# Altium PCB ywz0705_3.PcbDoc
Units mil, origin at the board's own origin, x right, y up, seen from the top; angles counter-clockwise.
Board outline 6000 x 4000 mil, 2 copper layers (Top Layer, Bottom Layer); 10 components, 30 nets, 124 pads, 5 vias.
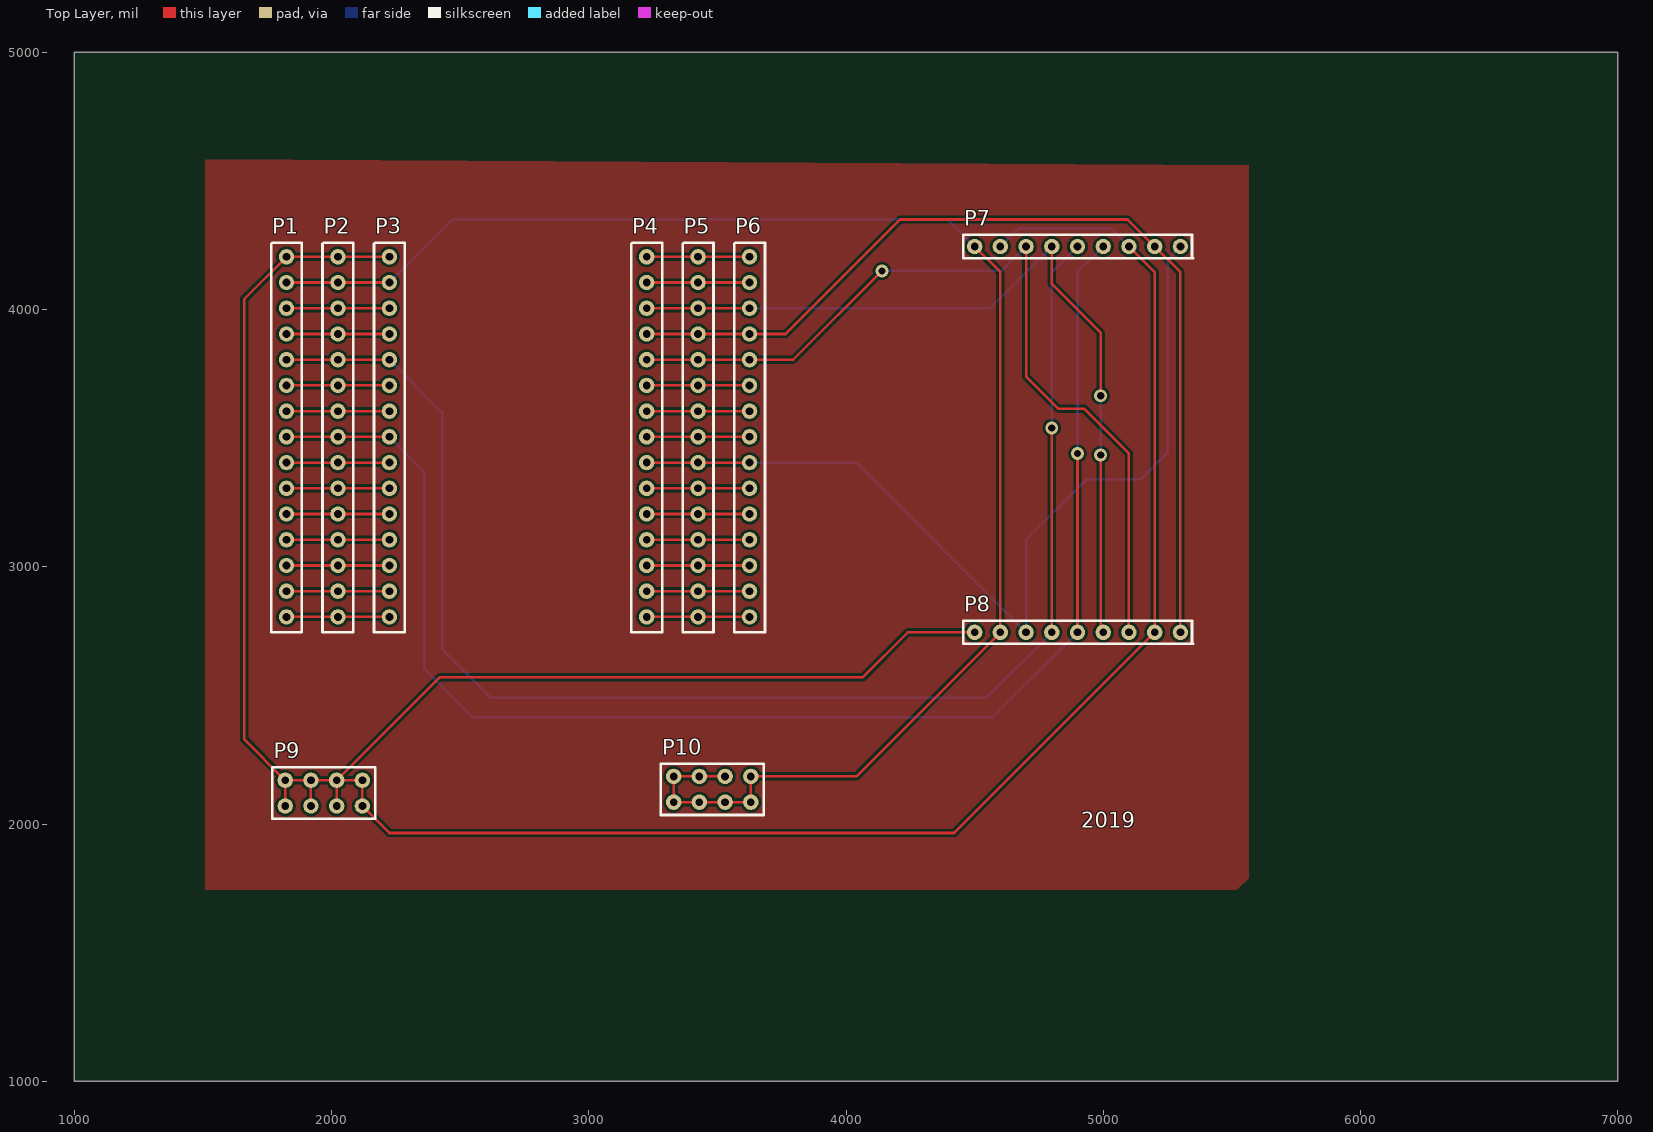
[diagram p0: Top Layer view]
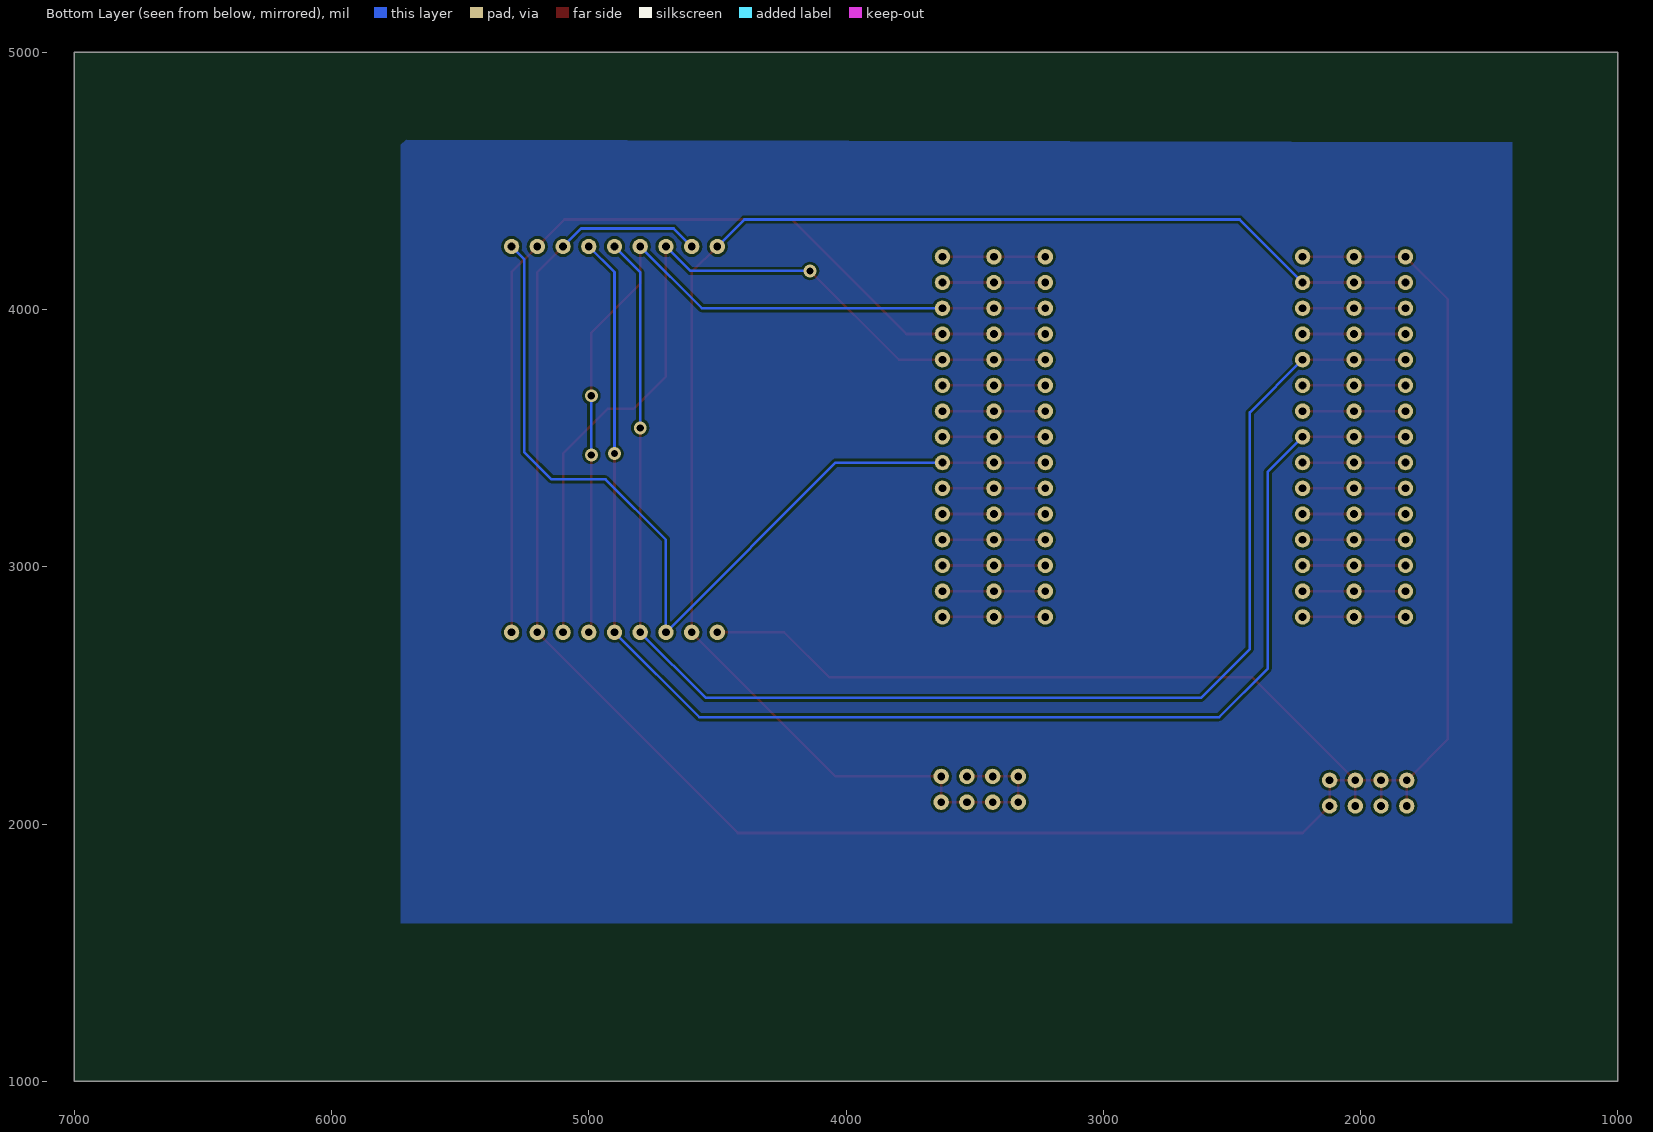
[diagram p1: Bottom Layer view, seen from below]

## Layer stack, top to bottom
Top Solder: solder mask 0.4, Solder Resist, Dk 3.5
Top Layer: signal copper 1.4
Dielectric 1: dielectric 12.6, FR-4, Dk 4.8
Bottom Layer: signal copper 1.4
Bottom Solder: solder mask 0.4, Solder Resist, Dk 3.5

## Board outline
1000,1000 7000,1000 7000,5000 1000,5000

## Design rules (kind name [scope] priority, off if disabled: settings)
Clearance [All] p1: gap=10 ignorepadtopadclearanceinfootprint=FALSE except(0: Arc-Hole Track-Hole SMDPad-Hole THPad-Hole Via-Hole Fill-Hole Poly-Hole Region-Hole Text-Hole)
PolygonConnect [All] p1: connectstyle=Relief reliefconductorwidth=10 reliefentries=4 polygonreliefangle="90 Angle" airgapwidth=10
RoomDefinition ywz0705_2 [InComponentClass('ywz0705_2')] p1: confinementstyle=ConfineIn formatcopy=TRUE lockcomponents=FALSE outline 1570,1865 5415,1865 5415,4430 1570,4430
RoutingVias [All] p1: holewidth=28 width=50 viastyle="Through Hole" minholewidth=28 minwidth=50 maxholewidth=28 maxwidth=50
SolderMaskExpansion [All] p1: expansion=4
Width [All] p1: maxlimit=10 minlimit=10 preferedwidth=10
30 further rules are at their usual default settings.

## Components (designator, comment, footprint, x,y, rotation, side; value= is the part's Value field where it differs from the comment)
P1 "paizhen_15" paizhen_15 1825,2805 r0 top
P2 "paizhen_15" paizhen_15 2025,2805 r0 top
P3 "paizhen_15" paizhen_15 2225,2805 r0 top
P4 "paizhen_15" paizhen_15 3225,2805 r0 top
P5 "paizhen_15" paizhen_15 3425,2805 r0 top
P6 "paizhen_15" paizhen_15 3625,2805 r0 top
P7 "paizhen_9" paizhen_9 4500,4245 r270 top
P8 "paizhen_9" paizhen_9 4500,2745 r270 top
P9 "paizhen_2_4" paizhen_2_4 2120,2070 r90 top
P10 "paizhen_2_4" paizhen_2_4 3630,2085 r90 top

## Footprints (in the part's own frame and the unit in brackets; to place one, negate y for a bottom-side part, rotate by r counter-clockwise, add the part's x,y. Pads: shape width x height; smd on the part's side, far side on the other; paste and mask are expansions set on the pad)
paizhen_2_4 [mil]
  round 60 hole 30: 1(100,0) 2(100,100) 3(100,200) 4(100,300) 5(0,300) 6(0,200) 7(0,100) 8(0,0)
  silkscreen extent -50,-50 150,350
paizhen_9 [mil]
  round 60 hole 30: 1(0,0) 2(0,100) 3(0,200) 4(0,300) 5(0,400) 6(0,500) 7(0,600) 8(0,700) 9(0,800)
  silkscreen extent -45,-45 45,850
paizhen_15 [mil]
  round 60 hole 30: 1(0,0) 2(0,100) 3(0,200) 4(0,300) 5(0,400) 6(0,500) 7(0,600) 8(0,700) 9(0,800) 10(0,900) 11(0,1000) 12(0,1100) 13(0,1200) 14(0,1300) 15(0,1400)
  silkscreen extent -60,-60 60,1455

## Via types
v1: diameter 50, hole 28, Top Layer to Bottom Layer, 5 vias

## Nets (pads, with @x,y where several pads share a name; then routed paths per layer and width w, separated by ;. In a path a pad name is that pad's centre, name@x,y a point inside that pad or via, vN(x,y) a via of type N, cw(c..) or ccw(c..) an arc to the next point about the centre after c; other vN are vias at no path point)
P1: P1.1 P2.1 P3.1 | length 400
  Top Layer w10: P1.1 P2.1 P3.1
P2: P1.2 P2.2 P3.2 | length 400
  Top Layer w10: P1.2 P2.2 P3.2
P3: P1.3 P2.3 P3.3 | length 400
  Top Layer w10: P1.3 P2.3 P3.3
P4: P1.4 P2.4 P3.4 | length 400
  Top Layer w10: P1.4 P2.4 P3.4
P5: P1.5 P2.5 P3.5 | length 400
  Top Layer w10: P1.5 P2.5 P3.5
P6: P1.6 P2.6 P3.6 | length 400
  Top Layer w10: P1.6 P2.6 P3.6
P7: P1.7 P2.7 P3.7 | length 400
  Top Layer w10: P1.7 P2.7 P3.7
P8: P1.8 P2.8 P3.8 P7.6 P8.5 | length 5666.9
  Top Layer w10: P1.8 P2.8 P3.8 ; P8.5 v1(4900,3440)
  Bottom Layer w10: P3.8 2360,3370 2360,2605 2550,2415 4570,2415 P8.5 ; v1@4890,3450 v1(4900,3440) 4900,4145 P7.6
P9: P1.9 P2.9 P3.9 | length 400
  Top Layer w10: P1.9 P2.9 P3.9
P10: P1.10 P2.10 P3.10 | length 400
  Top Layer w10: P1.10 P2.10 P3.10
P11: P1.11 P2.11 P3.11 P7.5 P8.4 | length 5719.8
  Top Layer w10: P1.11 P2.11 P3.11 ; P8.4 v1(4800,3540)
  Bottom Layer w10: P3.11 2430,3600 2430,2680 2620,2490 4545,2490 P8.4 ; v1@4790,3550 v1(4800,3540) 4800,4145 P7.5
P12: P1.12 P2.12 P3.12 | length 400
  Top Layer w10: P1.12 P2.12 P3.12
P13: P1.13 P2.13 P3.13 | length 400
  Top Layer w10: P1.13 P2.13 P3.13
P14: P1.14 P2.14 P3.14 P7.1 P8.2 P10.1 P10.2 P10.3 P10.4 P10.5 P10.6 P10.7 P10.8 | length 6268.4
  Top Layer w10: P1.14 P2.14 P3.14 ; P10.2 P10.3 P10.4 P10.5 P10.6 P10.7 P10.8 P10.1 4040,2185 P8.2 4600,4145 P7.1
  Bottom Layer w10: P3.14 2470,4350 4395,4350 P7.1 P7.1@4500,4250
P15: P1.15 P2.15 P3.15 P7.2 P7.7 P8.1 P8.8 P9.1 P9.2 P9.3 P9.4 P9.5 P9.6 P9.7 P9.8 | length 11533.8
  Top Layer w10: P9.5 P9.4 ; P9.6 P9.3 ; P9.7 P9.2 ; P3.15 P2.15 P1.15 1660,4040 1660,2330 P9.4 ; P8.1 4240,2745 4065,2570 2420,2570 P9.2 ; P7.7 5200,4145 P8.8 4420,1965 2225,1965 P9.8 P9.1 P9.2 ; P9.4 P9.3 ; P9.3 P9.2
  Bottom Layer w10: P7.2 4670,4315 5030,4315 P7.7
P16: P4.1 P5.1 P6.1 | length 400
  Top Layer w10: P4.1 P5.1 P6.1
P17: P4.2 P5.2 P6.2 | length 400
  Top Layer w10: P4.2 P5.2 P6.2
P18: P4.3 P5.3 P6.3 | length 400
  Top Layer w10: P4.3 P5.3 P6.3
P19: P4.4 P5.4 P6.4 | length 400
  Top Layer w10: P4.4 P5.4 P6.4
P20: P4.5 P5.5 P6.5 | length 400
  Top Layer w10: P4.5 P5.5 P6.5
P21: P4.6 P5.6 P6.6 | length 400
  Top Layer w10: P4.6 P5.6 P6.6
P22: P4.7 P5.7 P6.7 P7.9 P8.3 | length 3624.9
  Top Layer w10: P4.7 P5.7 P6.7 ; P8.3@4700,2740 P8.3
  Bottom Layer w10: P6.7 4040,3405 P8.3 4700,3105 4935,3340 5145,3340 5250,3445 5250,4195 P7.9
P23: P4.8 P5.8 P6.8 | length 400
  Top Layer w10: P4.8 P5.8 P6.8
P24: P4.9 P5.9 P6.9 | length 400
  Top Layer w10: P4.9 P5.9 P6.9
P25: P4.10 P5.10 P6.10 | length 400
  Top Layer w10: P4.10 P5.10 P6.10
P26: P4.11 P5.11 P6.11 P7.3 P8.7 | length 3381.5
  Top Layer w10: P4.11 P5.11 P6.11 3795,3805 v1(4140,4150) ; P7.3 4700,3740 4825,3615 4925,3615 5100,3440 P8.7
  Bottom Layer w10: v1(4140,4150) 4605,4150 P7.3
P27: P4.12 P5.12 P6.12 P7.8 P8.9 | length 3744.2
  Top Layer w10: P4.12 P5.12 P6.12 3765,3905 4210,4350 5095,4350 P7.8 5300,4145 P8.9
P28: P4.13 P5.13 P6.13 P7.4 P8.6 | length 3257.3
  Top Layer w10: P4.13 P5.13 P6.13 ; P7.4 4800,4100 4990,3910 v1(4990,3665) ; v1(4990,3435) 4990,2755 P8.6
  Bottom Layer w10: P6.13 4560,4005 P7.4 ; v1(4990,3435) v1(4990,3665)
P29: P4.14 P5.14 P6.14 | length 400
  Top Layer w10: P4.14 P5.14 P6.14
P30: P4.15 P5.15 P6.15 | length 400
  Top Layer w10: P4.15 P5.15 P6.15

## Polygon pours and split planes (outlines as drawn)
no net on Top Layer (solid, pour order 2): 5980,4055
no net on Top Layer (solid, pour order 0): 1515,4585 1510,4580 1510,1745 5520,1745 5565,1790 5565,4560
no net on Bottom Layer (solid, pour order 4): 1410,4650 1410,1615 5730,1615 5730,4640 5710,4660

## Silkscreen, mask and mechanical layers (free items; w line width, h text height)
Top Overlay:
  text "2019" at 4915,1985 h60
Mechanical 1:
  lines w10: 1575,1875 1580,1870 5405,1870 5415,1880 5415,4445 5395,4425 1575,4425 1575,1875